# Altium PCB ecs8a_pcb_debug.PcbDoc
Units mil, origin at the board's own origin, x right, y up, seen from the top; angles counter-clockwise.
Board outline 2340 x 2510 mil, 2 copper layers (Top Layer, Bottom Layer); 67 components, 46 nets, 196 pads, 85 vias.
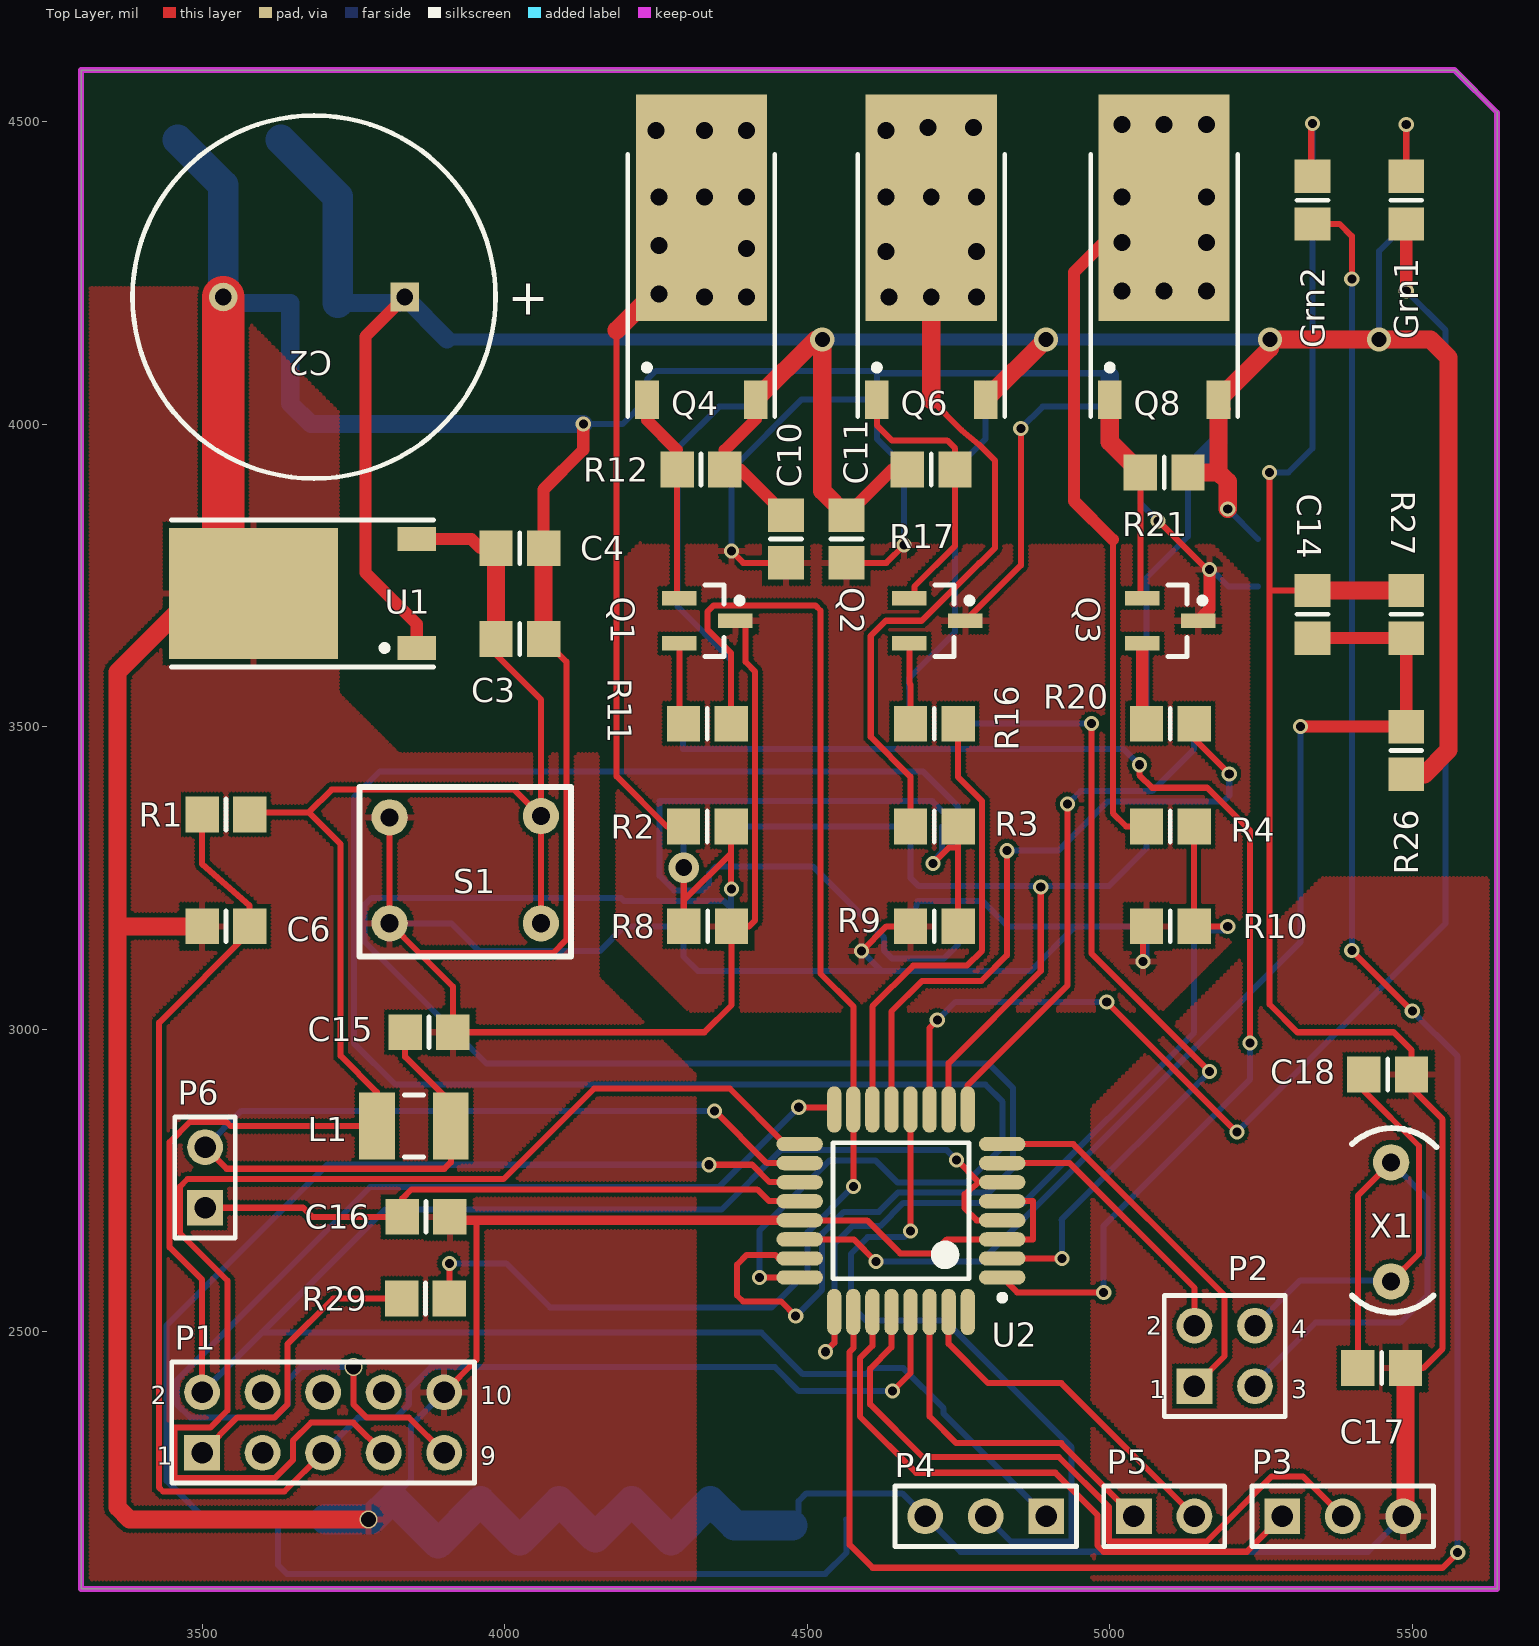
[diagram p0: Top Layer view]
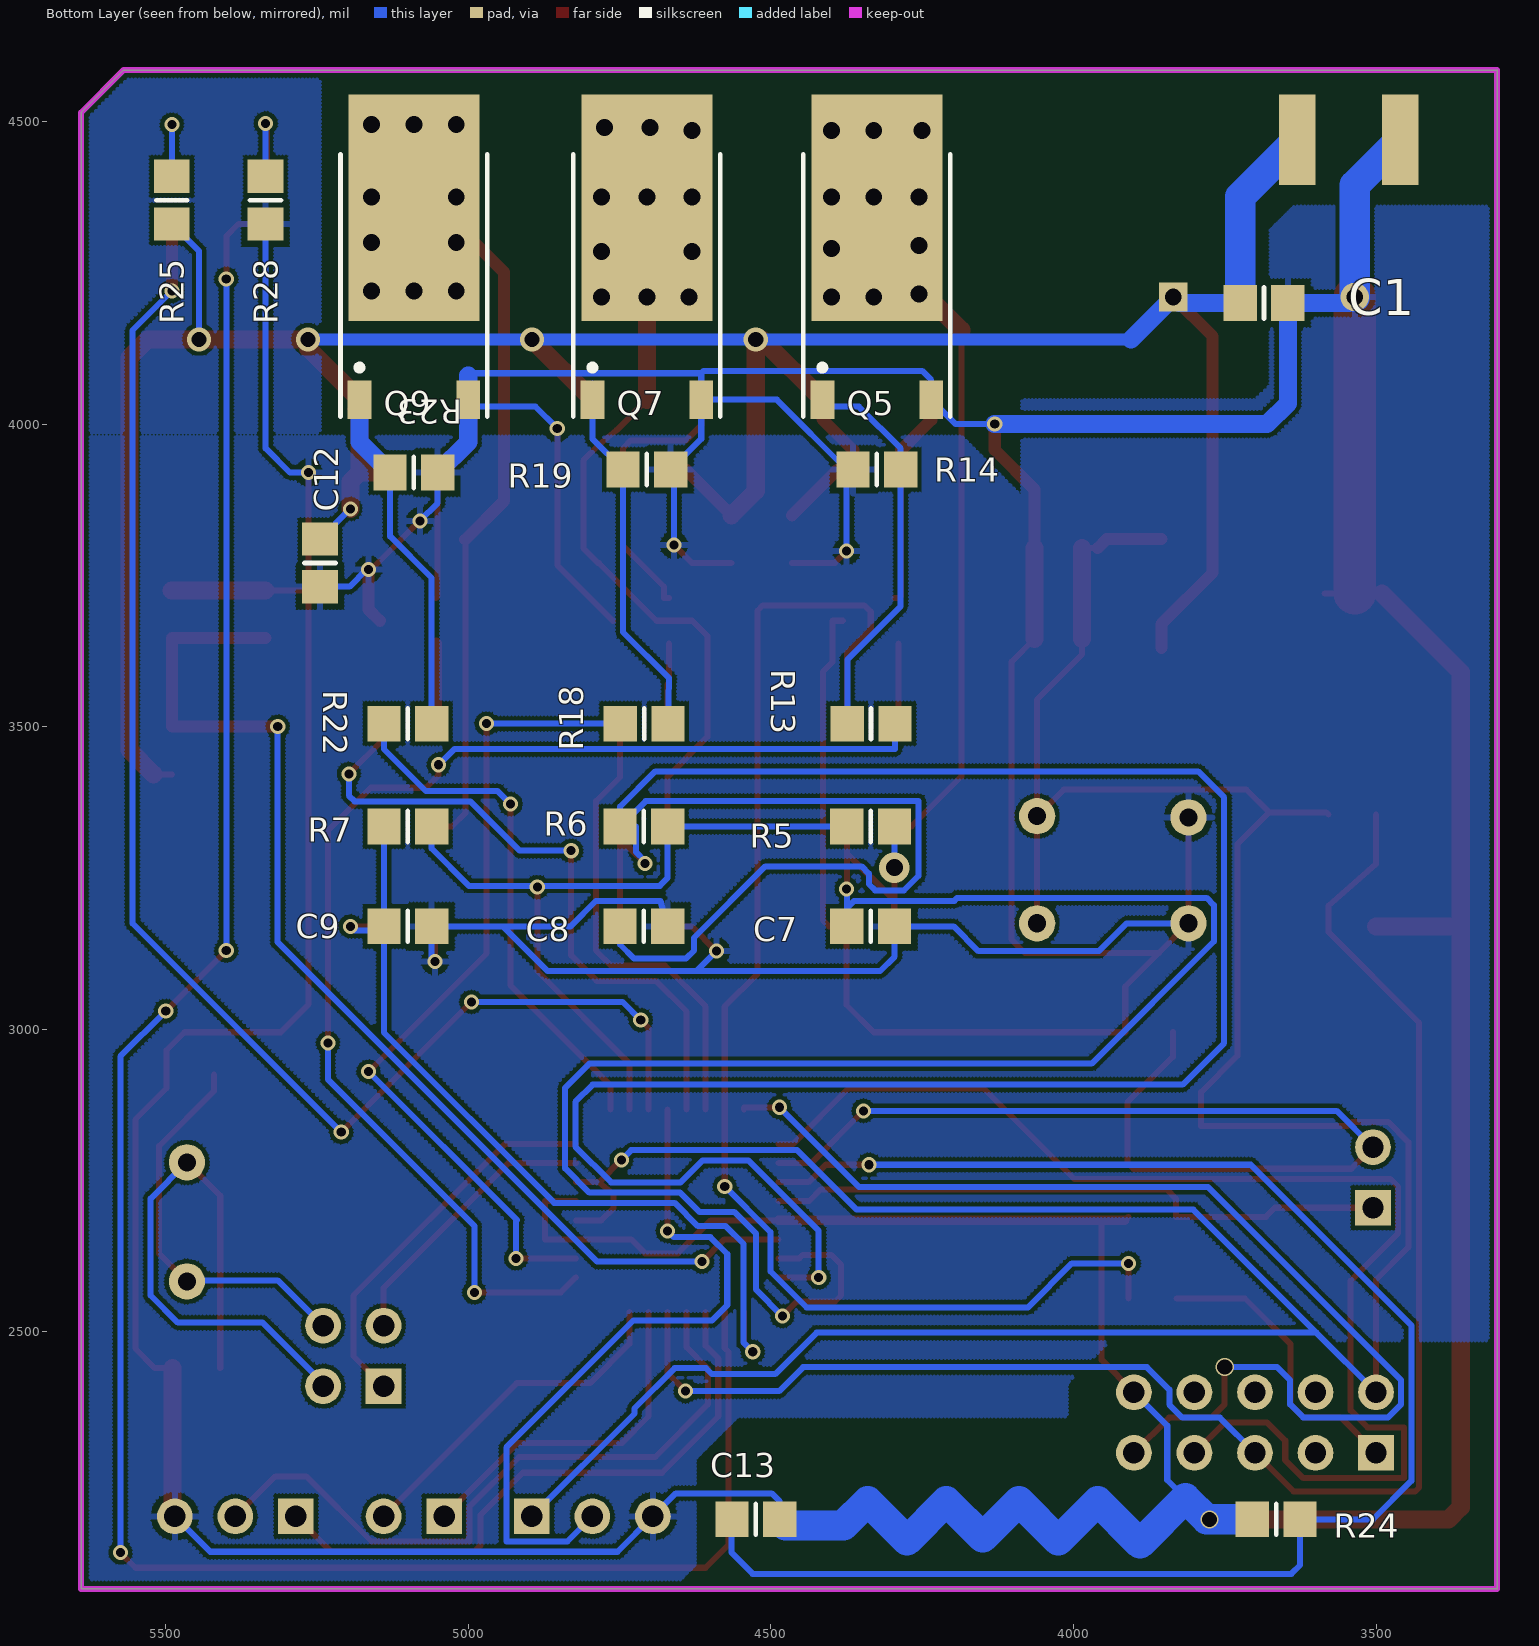
[diagram p1: Bottom Layer view, seen from below]

## Layer stack, top to bottom
Top Solder: solder mask 0.4, Solder Resist, Dk 3.5
Top Layer: signal copper 1.4
Dielectric 1: dielectric 12.6, FR-4, Dk 4.8
Bottom Layer: signal copper 1.4
Bottom Solder: solder mask 0.4, Solder Resist, Dk 3.5

## Board outline
3300,2075 3300,4585 5570,4585 5640,4515 5640,2075

## Design rules (kind name [scope] priority, off if disabled: settings)
Clearance [All] p1: gap=7
HoleSize [All] p1: absolutevalues=TRUE maxlimit=100 minlimit=12 maxpercent=80.000 minpercent=20.000
PolygonConnect [All] p1: connectstyle=Relief reliefconductorwidth=10 reliefentries=4 polygonreliefangle="90 Angle" airgapwidth=10
RoutingVias [All] p1: holewidth=28 width=50 viastyle="Through Hole" minholewidth=28 minwidth=50 maxholewidth=28 maxwidth=50
SolderMaskExpansion [All] p1: expansion=4
Width [All] p1: maxlimit=70 minlimit=10 preferedwidth=10
29 further rules are at their usual default settings.

## Components (designator, comment, footprint, x,y, rotation, side; value= is the part's Value field where it differs from the comment)
C1 "Cap" 6-0805_M 3685,4200 r0 bottom
C2 "Cap Pol1" RB7.6-15 3685,4210 r0 top
C3 "Cap" 6-0805_M 4025,3645 r180 top
C4 "Cap" 6-0805_M 4025,3795 r180 top
C6 "Cap" 6-0805_M 3539.37,3170 r0 top
C7 "Cap" 6-0805_M 4335,3170 r180 bottom
C8 "Cap" 6-0805_M 4710,3170 r180 bottom
C9 "Cap" 6-0805_M 5100,3170 r180 bottom
C10 "Cap" 6-0805_M 4465,3810 r90 top
C11 "Cap" 6-0805_M 4565,3810 r90 top
C12 "Cap" 6-0805_M 5245,3770.63 r90 bottom
C13 "Cap" 6-0805_M 4525,2190 r0 bottom
C14 "Cap" 6-0805_M 5335,3685.63 r90 top
C15 "Cap" 6-0805_M 3875,2995 r0 top
C16 "Cap" 6-0805_M 3870,2690 r0 top
C17 "Cap" 6-0805_M 5449.37,2440 r0 top
C18 "Cap" 6-0805_M 5459.37,2925 r0 top
Grn1 "LED0" 6-0805_M 5490,4370 r270 top
Grn2 "LED0" 6-0805_M 5335,4370 r90 top
L1 "Inductor" C1210_M 3850,2840 r0 top
P1 "Header 5X2" HDR2X5 3500,2300 r0 top
P2 "Header 2X2" HDR2X2 5140,2410 r0 top
P3 "Header 3" HDR1X3 5285,2195 r0 top
P4 "Header 3" HDR1X3 4895,2195 r180 top
P5 "Header 2" HDR1X2 5040,2195 r0 top
P6 "Header 2" HDR1X2 3505,2705 r90 top
Q1 "2N3904" SOT23_M 4335,3675 r0 top
Q2 "2N3904" SOT23_M 4715,3675 r0 top
Q3 "2N3904" SOT23_M 5100,3675 r0 top
Q4 "IRFR5305" TO-252AA 4325,4175.16 r0 top
Q5 "IRFR1205" TO-252AA 4325,4175.16 r180 bottom
Q6 "IRFR5305" TO-252AA 4705,4175.16 r0 top
Q7 "IRFR1205" TO-252AA 4705,4175.16 r180 bottom
Q8 "IRFR5305" TO-252AA 5090,4175.16 r0 top
Q9 "IRFR1205" TO-252AA 5090,4175.16 r180 bottom
R1 "Res3" 6-0805_M 3539.37,3355 r0 top
R2 "Res3" 6-0805_M 4335,3335 r0 top
R3 "Res3" 6-0805_M 4710,3335 r0 top
R4 "Res3" 6-0805_M 5100,3335 r0 top
R5 "Res3" 6-0805_M 4335,3335 r0 bottom
R6 "Res3" 6-0805_M 4710,3335 r180 bottom
R7 "Res3" 6-0805_M 5100,3335 r180 bottom
R8 "Res3" 6-0805_M 4335.63,3170 r180 top
R9 "Res3" 6-0805_M 4710,3170 r0 top
R10 "Res3" 6-0805_M 5100,3170 r0 top
R11 "Res1" 6-0805_M 4335,3505 r0 top
R12 "Res3" 6-0805_M 4324.37,3925 r180 top
R13 "Res1" 6-0805_M 4334.37,3505 r180 bottom
R14 "Res3" 6-0805_M 4325,3925 r180 bottom
R16 "Res1" 6-0805_M 4710,3505 r0 top
R17 "Res3" 6-0805_M 4705,3925 r0 top
R18 "Res1" 6-0805_M 4709.37,3505 r0 bottom
R19 "Res3" 6-0805_M 4705,3925 r0 bottom
R20 "Res1" 6-0805_M 5100,3505 r0 top
R21 "Res3" 6-0805_M 5090,3920 r180 top
R22 "Res1" 6-0805_M 5100,3505 r0 bottom
R23 "Res3" 6-0805_M 5090,3920 r0 bottom
R24 "Res3" 6-0805_M 3665,2190 r180 bottom
R25 "Res3" 6-0805_M 5490,4370 r270 bottom
R26 "Res3" 6-0805_M 5490,3460.63 r270 top
R27 "Res3" 6-0805_M 5490,3685.63 r270 top
R28 "Res3" 6-0805_M 5335,4370 r90 bottom
R29 "Res3" 6-0805_M 3869.37,2555 r180 top
S1 "SW-DPST" switch_4 4060,3175 r180 top
U1 "78M05" TO-252AA 3719.84,3720 r90 top
U2 "ATmega8A-AU" 32A_M 4655,2700 r180 top
X1 "X1 16M" OSC 5465,2780 r270 top

## Footprints (in the part's own frame and the unit in brackets; to place one, negate y for a bottom-side part, rotate by r counter-clockwise, add the part's x,y. Pads: shape width x height; smd on the part's side, far side on the other; paste and mask are expansions set on the pad)
6-0805_M [mm] "Chip Resistor, Body 2.0x1.2mm, IPC Low Density"
  rect 1.4x1.5 smd: 1(-1,0) 2(1,0)
  silkscreen extent 0,-0.65 0,0.65, body extent -1.07,-0.7 1.07,0.7, height 0.7
32A_M [mm] "Thin QFP, 32-Leads, Body 7x7mm, Pitch 0.8mm, IPC Low Density"
  oval 1.95x0.6 smd: 1(-4.25,2.8) 2(-4.25,2) 3(-4.25,1.2) 4(-4.25,0.4) 5(-4.25,-0.4) 6(-4.25,-1.2) 7(-4.25,-2) 8(-4.25,-2.8) 17(4.25,-2.8) 18(4.25,-2) 19(4.25,-1.2) 20(4.25,-0.4) 21(4.25,0.4) 22(4.25,1.2) 23(4.25,2) 24(4.25,2.8)
  oval 0.6x1.95 smd: 9(-2.8,-4.25) 10(-2,-4.25) 11(-1.2,-4.25) 12(-0.4,-4.25) 13(0.4,-4.25) 14(1.2,-4.25) 15(2,-4.25) 16(2.8,-4.25) 25(2.8,4.25) 26(2,4.25) 27(1.2,4.25) 28(0.4,4.25) 29(-0.4,4.25) 30(-1.2,4.25) 31(-2,4.25) 32(-2.8,4.25)
  silkscreen extent -4.38,-2.85 2.85,3.77, body extent -3.5,-3.5 3.5,3.5, height 1.2
C1210_M [mm] "Chip Capacitor, Body 3.2x2.5mm, IPC Low Density"
  rect 1.5x2.8 smd: 1(-1.55,0) 2(1.55,0)
  silkscreen extent -0.4,-1.3 0.4,1.3, body extent -1.7,-1.35 1.7,1.35, height 1.5
HDR1X2 [mm] "Connector; Header; 2 Position"
  rect 1.5x1.5 hole 0.9: 1(0,0)
  round 1.5 hole 0.9: 2(2.54,0)
  silkscreen extent -1.27,-1.27 3.81,1.27
HDR1X3 [mm] "Connector; Header; 3 Position"
  rect 1.5x1.5 hole 0.9: 1(0,0)
  round 1.5 hole 0.9: 2(2.54,0) 3(5.08,0)
  silkscreen extent -1.27,-1.27 6.35,1.27
HDR2X2 [mm] "Connector; Header; 2x2 Position"
  rect 1.5x1.5 hole 0.9: 1(0,0)
  round 1.5 hole 0.9: 2(0,2.54) 3(2.54,0) 4(2.54,2.54)
  silkscreen extent -1.27,-1.27 3.81,3.81
HDR2X5 [mm] "Connector; Header; 5x2 Position"
  rect 1.5x1.5 hole 0.9: 1(0,0)
  round 1.5 hole 0.9: 2(0,2.54) 3(2.54,0) 4(2.54,2.54) 5(5.08,0) 6(5.08,2.54) 7(7.62,0) 8(7.62,2.54) 9(10.16,0) 10(10.16,2.54)
  silkscreen extent -1.27,-1.27 11.43,3.81
OSC [mil]
  round 60 hole 30: 1(0,0) 2(196.85,0)
  silkscreen extent -57,-65 248,75
RB7.6-15 [mm] "Polarized Capacitor (Radial); 2 Leads"
  rect 1.2x1.2 hole 0.7: 1(3.81,0)
  round 1.2 hole 0.7: 2(-3.81,0)
  silkscreen extent -7.62,-7.62 7.62,7.62
SOT23_M [mm] "SOT23, 3-Leads, Body 2.9x1.3mm, Pitch 0.95mm, Lead Span 2.3mm - Reverse Pinning, IPC Low Density"
  rect 1.45x0.6 smd: 1(1.175,0) 2(-1.175,-0.95) 3(-1.175,0.95)
  silkscreen extent -0.1,-1.5 1.48,1.5, body extent -0.7,-1.5 0.7,1.5, height 1.1
switch_4 [mil]
  round 60 hole 30: 1(0,0) 2(250,0) 3(0,-177.17) 4(250,-175)
  silkscreen extent -50,-225 300,55
TO-252AA [mm] "D-PAK/TO-252-AA; 3 Leads (1 Cropped); Body 10.4 (inc. leads) x 6.7 mm (LxW max)"
  rect 1x1.6 smd: 1(-2.285,-3.425) 3(2.285,-3.425)
  rect 5.5x7.1 smd: 4(0,3.425)
  silkscreen extent -3.08,-4.12 3.08,6.87

## Part data
C1 C3 C4 C6 C7 C8 C9 C10 C11 C12 C13 C14 C15 C16 C17 C18: "Capacitor"
C2: "Polarized Capacitor (Radial)"
Grn1 Grn2: "Typical INFRARED GaAs LED"
P1: "Header, 5-Pin, Dual row"
P2: "Header, 2-Pin, Dual row"
P3 P4: "Header, 3-Pin"
P5 P6: "Header, 2-Pin"
Q1 Q2 Q3: "NPN General Purpose Amplifier"
Q4 Q5 Q6 Q7 Q8 Q9: "HEXFET Power MOSFET"
R1 R2 R3 R4 R5 R6 R7 R8 R9 R10 R11 R12 R13 R14 R16 R17 R18 R19 R20 R21 R22 R23 R24 R25 R26 R27 R28 R29: "Resistor"
S1: "Double-Pole, Single-Throw Switch"
U1 X1: library part Component_1
U2: "8-bit AVR Microcontroller, 2.7-5.5V, 16MHz, 8KB Flash, 512 Bytes EEPROM, 1KB SRAM, 32-pin TQFP, Industrial Grade (-40°C to 85°C)"

## Free pads (board coordinates)
  rect 216.53x100 smd: 2(4325,4495) 3(5090,4495) 4(4705,4495)
  rect 60x150 smd far side: 5(3460,4470) 6(3630,4470)
  rect 216.53x100 smd far side: 7(4325,4495) 8(4705,4495) 9(5090,4495)

## Via types
v1: diameter 25, hole 15, Top Layer to Bottom Layer, 46 vias
v2: diameter 50, hole 28, Top Layer to Bottom Layer, 33 vias
v3: diameter 40, hole 25, Top Layer to Bottom Layer, 4 vias
v4: diameter 30, hole 25, Top Layer to Bottom Layer, 2 vias

## Nets (pads, with @x,y where several pads share a name; then routed paths per layer and width w, separated by ;. In a path a pad name is that pad's centre, name@x,y a point inside that pad or via, vN(x,y) a via of type N, cw(c..) or ccw(c..) an arc to the next point about the centre after c; other vN are vias at no path point)
+5V: C3.2 C4.2 L1.1 P1.2 P4.1 R1.2 S1.1 S1.3 U1.3 U2.4 U2.6 | length 5734.8
  Top Layer w10: P1.2 3500,2586 3446.47,2639.53 3446.47,2813.47 3480,2847 3540,2847 3547,2840 L1.1 3788.98,2896.02 3729,2956 3729,3306 3676.5,3358.5 ; R1.2 3582.24,3358.5 3676.5,3358.5 ; C4.2@3960,3795 C4.2 ; C3.2 3985.63,3619.37 4060,3545 S1.3 ; S1.1 S1.3 ; v1(4747,2784) 4783.76,2747.24 ; U2.4 4780,2684.25 4760,2704.25 4760,2727.24 4783.76,2747.24 ; U2.6 4783.76,2747.24 ; 3676.5,3358.5 3714,3396 4016.17,3396 S1.3
  Top Layer w20: U1.3 3945.04,3809.96 C4.2@3960,3795
  Top Layer w30: C3.2 C4.2
  Bottom Layer w10: P1.2 3598.53,2498.53 ; v1(4747,2784) 4730.74,2800.26 4456.65,2800.26 4358.39,2702 3802,2702 3598.53,2498.53 ; P4.1 4725.41,2364.59 4725.41,2373.49 4658.9,2440 4607.26,2440 4597.26,2430 4493,2430 4424.47,2498.53 3598.53,2498.53
AH: R11.2 R29.1 U2.15 | length 2246.2
  Top Layer w10: R29.1 v1(3908.74,2613) ; R11.2 4374.37,3621.63 4335,3661 4335,3690 4345,3700 4514,3700 4522,3692 4522,3092 4576.26,3037.74 U2.15 v1(4576.26,2740.32)
  Bottom Layer w10: v1(3908.74,2613) 4002.45,2613 4075,2540.45 4441.1,2540.45 4500.65,2600 4500.65,2664.7 v1(4576.26,2740.32)
AL: R13.2 U2.1 | length 2086.1
  Top Layer w10: U2.1 4847.09,2565 v1(4990,2565) ; v1(5049,3437) 5049,3420 5070,3399 5161,3399 5232,3328 v1(5232,2977)
  Bottom Layer w10: R13.2 4295,3463 5023,3463 v1(5049,3437) ; v1(4990,2565) 4990,2675 5232,2917 v1(5232,2977)
AVERAGE: R5.2 R6.2 R7.2 U2.10 | length 1271.3
  Top Layer w10: U2.10 4733.74,2943.97 4886,3096.23 v1(4886,3235)
  Bottom Layer w10: R5.2 R6.2 4670.63,3250 4683.63,3237 v1@4886,3237 ; v1(4886,3235) v1@4886,3237 ; R7.2 5060.63,3298.63 4999,3237 v1@4886,3237
BH: R16.2 U2.14 | length 781.3
  Top Layer w10: U2.14 4607.76,3037.76 4675,3105 4764,3105 4789,3130 4789,3377 4749.37,3416.63 R16.2
BL: R18.2 U2.2 | length 1386.7
  Top Layer w10: U2.2 v1(4921.26,2621.26) ; v1(4970,3505) 4970,3125 v1(5165,2930)
  Bottom Layer w10: R18.2 v1(4970,3505) ; v1(4921.26,2621.26) 4921.26,2683.74 4920,2685 v1(5165,2930)
CH: R20.2 U2.13 | length 1112.3
  Top Layer w10: U2.13 4639.25,3029.25 4690,3080 4788,3080 4830,3122 v1(4830,3295) ; R20.2 5139.37,3480.1 v1(5197.47,3422)
  Bottom Layer w10: v1(4830,3295) 4915,3295 4996.53,3376.53 5188,3376.53 5197.47,3386 v1(5197.47,3422)
CL: R22.2 U2.9 | length 861.9
  Top Layer w10: U2.9 4765.24,2907.24 4930,3072 v1(4930,3371.92)
  Bottom Layer w10: v1(4930,3371.92) 4951.61,3393.53 5069.9,3393.53 5139.37,3463 R22.2
CURRENT: C13.2 R24.2 U2.19 | length 2726.2
  Top Layer w10: v1(4338,2776) 4409,2776 4437.76,2747.24 U2.19
  Bottom Layer w10: v1(4338,2776) 3707,2776 3441.47,2510.47 3441.47,2253.53 3505,2190 R24.2 3625.63,2114.37 3640,2100 4530,2100 4565,2135 4565,2189.37 C13.2
GND: C1.1 C2.2 C3.1 C4.1 C6.1 C7.2 C8.2 C9.2 C10.1 C11.1 C12.1 C13.1 C14.2 C15.2 C16.2 C17.2 C18.2 P1.10 P3.3 P4.3 pad.5 Q1.1 Q2.1 Q3.1 Q5.3 Q7.3 Q9.3 R8.1 R9.1 R10.1 R14.1 R19.1 R23.1 R24.1 R27.1 R28.1 S1.2 S1.4 U1.4 U2.3 U2.5 U2.21 | length 17878.4
  Top Layer w10: 3360,3175 3365,3170 ; U1.4@3490,3720 3535,3720 U1.4 ; v4(3775,2190) v4@3785,2190 ; S1.4 S1.2 3859,3126 ; P1.10 3953.53,2453.53 3953.53,2680 3949.28,2684.25 ; C16.2 C16.2@3915.12,2684.25 ; C3.1 4102,3607.37 4102,3148 4080,3126 3859,3126 ; v1(4375,3790) 4394.37,3770.63 C10.1 ; Q1.1 4398,3675 4398,3607 4414,3591 4414,3180 4404,3170 R8.1 4375,3040 4330,2995 C15.2 3914.37,3070.63 3859,3126 ; U2.21 4599.08,2684.25 4653.75,2629.59 4707.75,2629.59 4730.92,2652.76 U2.3 4873,2652.76 4873,2715.75 U2.5 ; C11.1 4630.63,3770.63 v1(4660,3800) ; v1(4590,3129) 4631,3170 R9.1 ; Q2.1 4853,3766.74 v1(4853,3993) ; v1(5055,3112) 5055,3170 R10.1 ; v1(5080,3840) 5160,3760 v1(5165,3760) ; v1(5264,3920) 5264,3725 ; C14.2 5264,3725 ; P3.3 P3.3@5488.74,2198.74 ; C17.2 5518,2440 5550,2472 5550,2851 5498.74,2902.26 C18.2 5498.74,2965.26 5469,2995 5310,2995 5264,3041 5264,3725
  Top Layer w15: C16.2@3915.12,2684.25 3949.28,2684.25 U2.21
  Top Layer w20: C4.1 4064.37,3892 4130,3957.63 v1(4130,4000) ; Q3.1 5165,3693.74 v1(5165,3760)
  Top Layer w30: 3365,3170 C6.1 ; U1.4@3490,3720 3360,3590 3360,3175 3360,2210 3380,2190 v4(3775,2190) ; C3.1 C4.1 ; C14.2 R27.1 ; P3.3@5488.74,2198.74 C17.2
  Top Layer w70: U1.4@3535,3720 C2.2
  Bottom Layer w10: C2.2 C2.2@3545,4200 ; S1.2 3912,3175 3958,3129 4157,3129 4198,3170 C7.2 4295.63,3120 4319.63,3096 4623,3096 ; 3815,2225 3845,2255 3845,2345 P1.10 ; v1(4130,4000) 4194.73,4000 Q5.3 4235.04,4073.08 4250,4088.04 4611,4088.04 4615.04,4084 ; v1(4375,3790) 4375,3914.37 R14.1 4375,3925 4490.31,4040.31 Q7.3 ; C13.1@4475.63,2180 C13.1 4485.63,2220 4498.63,2233 4657,2233 P4.3 4753.53,2136.47 5426.47,2136.47 P3.3 ; v1(4590,3129) 4623,3096 ; v1(4660,3800) 4660,3919.37 R19.1 4615.04,3975.59 Q7.3 ; C8.2 4682.63,3212 4789,3212 4831,3170 4943,3170 ; v1(4853,3993) 4889,4029 5000.04,4029 Q9.3 ; 5000.04,4080 4996.04,4084 4615.04,4084 ; R23.1 5050.63,3869.37 v1(5080,3840) ; v1(5055,3112) 5060.63,3117.63 C9.2 4943,3170 ; v1(5165,3760) 5167.52,3760 5196.26,3731.26 C12.1 ; v1(5264,3920) 5295,3920 5335,3960 R28.1 ; Q7.3 4615.04,4084 ; 4623,3096 4869,3096 4943,3170
  Bottom Layer w30: C2.2@3545,4200 C1.1 3645.63,4034.37 3680,4000 v1(4130,4000) ; Q9.3@5000.04,4029 5000.04,3970.59 R23.1 ; Q9.3 5000.04,4080
  Bottom Layer w50: pad.5 3535,4395 C2.2 ; R24.1 v4(3775,2190) 3780,2190 3815,2225 3890,2150 3960,2220 4025,2155 4090,2220 4150,2160 4210,2220 4275,2155 4340,2220 4380,2180 C13.1@4475.63,2180
GREEN: Grn1.2 U2.11 | length 2419.9
  Top Layer w10: U2.11 4702.24,3002.24 v1(4715,3015) ; v1(4995,3045) v1(5210,2830)
  Top Layer w20: v1(5490,4220) Grn1.2
  Bottom Layer w10: v1(4715,3015) 4745,3045 v1(4995,3045) ; v1(5210,2830) 5555,3175 5555,4155 v1(5490,4220)
MISO: P1.9 U2.16 | length 1920.4
  Top Layer w10: v4(3750,2442) 3750,2380 3772,2358 3842,2358 P1.9 ; v1(4486,2871) 4544.76,2871 U2.16
  Bottom Layer w10: v4(3750,2442) 3664,2442 3642,2420 3642,2380 3620.47,2358.47 3480,2358.47 3458.47,2380 3458.47,2420 3777.47,2739 4354,2739 v1(4486,2871)
NetC15_1: C15.1 L1.2 P6.2 U2.18 | length 1714.6
  Top Layer w10: P6.2 3540.56,2769.44 3900.46,2769.44 3911.02,2780 L1.2 3911.02,2879 3835.63,2954.39 C15.1 ; v1(4347,2865) 4433.26,2778.74 U2.18
  Bottom Layer w10: P6.2 3565,2865 v1(4347,2865)
NetC16_1: C16.1 P6.1 U2.20 | length 1033.4
  Top Layer w10: P6.1 3667,2705 3682,2690 C16.1 3830.63,2720 3846.07,2735.44 4417.31,2735.44 4437,2715.75 U2.20
NetC17_1: C17.1 P2.3 X1.1 | length 957.7
  Top Layer w10: C17.1 5410,2725 X1.1
  Bottom Layer w10: P2.3 5240,2415 5340,2515 5480,2515 5525,2560 5525,2720 X1.1
NetC18_1: C18.1 P2.4 X1.2 | length 655.4
  Top Layer w10: C18.1 5420,2898 5511,2807 5511,2629.15 X1.2
  Bottom Layer w10: P2.4 5315,2585 5463.15,2585 X1.2
NetGrn1_1: Grn1.1 R25.1 | length 171.3
  Top Layer w10: Grn1.1 v1(5490,4495)
  Bottom Layer w10: R25.1 v1(5490,4495)
NetGrn2_2: Grn2.2 R28.2 | length 178.1
  Top Layer w10: Grn2.2 5333,4409.37 5333,4495 v1(5335,4497)
  Bottom Layer w10: R28.2 v1(5335,4497)
NetP1_1: P1.1 R29.2 | length 494.2
  Top Layer w10: P1.1 3558.47,2358.47 3620,2358.47 3641.53,2380 3641.53,2480 3716.53,2555 R29.2
NetP2_1: P2.1 U2.8 | length 642
  Top Layer w10: U2.8 4939.76,2810.24 5190,2560 5190,2460 P2.1
NetP2_2: P2.2 U2.7 | length 465.6
  Top Layer w10: U2.7 4933.74,2778.74 5140,2572.48 P2.2
NetQ1_2: Q1.2 R11.1 | length 135.5
  Top Layer w10: Q1.2 4288.74,3511.89 R11.1
NetQ1_3: Q1.3 Q4.1 R12.2 | length 357.2
  Top Layer w10: 4235.04,4006.96 Q4.1 ; 4285,3957 R12.2 4285,3716.14 Q1.3 Q1.3@4295.76,3712.4
  Top Layer w20: 4235.04,4006.96 4285,3957
NetQ2_2: Q2.2 R16.1 | length 133.4
  Top Layer w10: Q2.2 4668.74,3571.89 4670.63,3570 R16.1
NetQ2_3: Q2.3 Q6.1 R17.2 | length 471.2
  Top Layer w10: Q6.1 4615.04,3997.96 4640,3973 4731.37,3973 4744.37,3960 R17.2 4744.37,3799 4677,3731.63 4677,3712.4 Q2.3
NetQ3_2: Q3.2 R20.1 | length 135.5
  Top Layer w10: R20.1@5053.74,3511.89 R20.1
  Top Layer w20: R20.1@5053.74,3511.89 Q3.2
NetQ3_3: Q3.3 Q8.1 R21.2 | length 350.2
  Top Layer w10: R21.2 5050.63,3715.51 Q3.3
  Top Layer w30: Q8.1 5000.04,3970.59 R21.2
NetQ5_1: Q5.1 R13.1 R14.2 | length 660.7
  Bottom Layer w10: R13.1 4373.74,3610.89 4285.63,3699 R14.2 4285.63,3960 4354.63,4029 4414.96,4029 Q5.1
NetQ7_1: Q7.1 R18.1 R19.2 | length 614.6
  Bottom Layer w10: R18.1 4668.24,3580 4744.37,3656.13 R19.2 4794.96,3975.59 Q7.1 Q7.1@4794.96,4067
NetQ9_1: Q9.1 R22.1 R23.2 | length 584.7
  Bottom Layer w10: R22.1 5060.63,3745.63 5129.37,3814.37 R23.2
  Bottom Layer w30: R23.2 5179.96,3970.59 Q9.1
NULLA: C7.1 R2.2 R5.1 R8.2 U2.23 | length 3257.1
  Top Layer w10: v2(4296,3267) 4296,3170 R8.2 4296.26,3213 4374.37,3291.11 ; R2.2 4374.37,3291.11 ; v1(4375,3232) 4374.37,3232.63 4374.37,3291.11 ; v1(4481,2526) 4457,2550 4394,2550 4384,2560 4384,2611 4400,2627 4447.26,2627 4453,2621.26 U2.23
  Bottom Layer w10: R5.1 4295.63,3286.37 4296,3286 v2(4296,3267) ; C7.1 4374.37,3200 ; v1(4375,3232) 4374.37,3231.37 4374.37,3200 ; v1(4481,2526) 4524.54,2569.54 4524.54,2662.19 4560.65,2698.3 4618.3,2698.3 4650,2730 4800,2730 4840,2770 4840,2903 4800,2943 3970,2943 3768,3145 3768,3205 3780,3217 4192,3217 4197,3212 4362.37,3212 4374.37,3200
NULLB: C8.1 R3.2 R6.1 R9.2 U2.24 | length 4887.7
  Top Layer w10: v1(4421,2589.76) U2.24 ; v1(4708,3274) 4734,3300 4749.37,3300 ; R9.2 4749.37,3300 ; R3.2 4749.37,3300
  Bottom Layer w10: v1(4421,2589.76) 4421,2667 4537.26,2783.26 4612.74,2783.26 4649,2747 4764,2747 4823,2806 4823,2880 4794.7,2908.3 3819.7,2908.3 3751,2977 3751,3383 3794,3426 4691,3426 4749.37,3367.63 R6.1 R6.1@4749,3335 ; v1(4708,3274) 4708,3278 4723,3293 4723,3335 R6.1@4749,3335 ; C8.1 4749.37,3140 4726.37,3117 4640,3117 4627,3130 4627,3151 4509,3269 4350,3269 4338,3257 4338,3240 4327.55,3229.55 4280,3229.55 4256,3253.55 4256,3377 4707,3377 R6.1@4749,3335
NULLC: C9.1 R4.2 R7.1 R10.2 U2.25 | length 1615.6
  Top Layer w10: v1(4530,2467) 4544.76,2481.76 U2.25 ; R4.2 5139,3335 5139,3170 R10.2 v1(5195,3170)
  Bottom Layer w10: v1(4530,2467) 4545,2482 4545,2645 4574.65,2674.65 4620.65,2674.65 4659,2713 4858,2713 5139.37,2994.37 C9.1@5139.37,3163 ; R7.1 C9.1 C9.1@5139.37,3163 ; v1(5195,3170) 5188,3163 C9.1@5139.37,3163
PHASEA: pad.2 pad.7 Q4.4 Q5.4 R2.1 | length 1095
  Top Layer w10: 4185,4155 4185,3418 4268,3335 R2.1 ; Q4.4@4325,4295 Q4.4
  Top Layer w30: 4185,4155 Q4.4@4325,4295
  other v2: 4330,4210 4400,4210 4255,4215 4400,4290 4255,4295 4255,4375 4330,4375 4400,4375 4250,4485 4330,4485 4400,4485
PHASEB: pad.4 pad.8 Q6.4 Q7.4 R3.1 | length 1232.4
  Top Layer w10: R3.1 4670.63,3417.37 4605,3483 4605,3650 4630,3675 4689,3675 4784,3770 4785,3770 4810,3795 4810,3940 4784,3966 4755,3990 4705,4040 ; v2(4705,4210) Q6.4 v2(4705,4375)
  Top Layer w30: 4705,4040 v2(4705,4210)
  other v2: 4635,4210 4780,4210 4630,4285 4780,4285 4630,4375 4780,4375 4630,4485 4700,4490 4775,4490
PHASEC: pad.3 pad.9 Q8.4 Q9.4 R4.1 | length 1264.7
  Top Layer w10: Q8.4@5000,4310 Q8.4 v2(5090,4220) Q8.4@5090,4204 ; 5005,3809 5005,3357 5027,3335 R4.1
  Top Layer w20: Q8.4@5000,4310 4941,4251 4941,3873 5005,3809
  other v2: 5020,4220 5160,4220 5020,4300 5160,4300 5020,4375 5160,4375 5020,4495 5090,4495 5160,4495
PPM: P4.2 U2.12 | length 1176.7
  Top Layer w10: v1(4670.75,2666.59) U2.12
  Bottom Layer w10: v1(4670.75,2666.59) 4660.58,2656.42 4600,2656.42 4572.12,2628.55 4572.12,2543.88 4597,2519 4727,2519 4937,2309 4937,2153.47 4836.53,2153.47 P4.2
RED: Grn2.1 U2.26 | length 3739.8
  Top Layer w10: U2.26 4576.26,2473 4570,2466.74 4570,2148 4608,2110 5550,2110 v1(5575,2135) ; Grn2.1 5380,4330.63 5400,4310.63 v1(5400,4240) ; v1(5400,3130) v1(5500,3030)
  Bottom Layer w10: v1(5400,3130) v1(5400,4240) ; v1(5500,3030) 5575,2955 v1(5575,2135)
RESET: C6.2 P1.5 R1.1 U2.29 | length 2684.2
  Top Layer w10: R1.1 3500,3273 3578.74,3204.26 C6.2 3578.74,3160.74 3429,3011 3429,2242.38 3435.37,2236.01 3636.01,2236.01 P1.5 ; v1(4641,2402) 4670.75,2431.75 U2.29
  Bottom Layer w10: P1.5 3758,2358 3820,2358 3841.53,2379.53 3841.53,2404.53 3878.53,2441.53 4446.76,2441.53 4486.29,2402 v1(4641,2402)
RXD: P5.1 U2.30 | length 579.4
  Top Layer w10: U2.30 4702.24,2360 4746.24,2316 4920,2316 4920,2315 P5.1
SCK: P1.7 U2.17 | length 2139
  Top Layer w10: P1.7 3750,2350 3680,2350 3650,2320 3650,2288 3620,2258 3454,2258 3454,2342 3514,2342 3542,2370 3542,2584.47 3463.47,2663 3463.47,2740 3475.91,2752.44 3998.44,2752.44 4148,2902 4372,2902 4463.76,2810.24 U2.17
SCL: P3.2 U2.28 | length 1147.4
  Top Layer w10: U2.28 4639.25,2474.25 4604,2439 4604,2380 4691,2293 4916,2293 4998.47,2210.53 4998.47,2153.47 5160,2153.47 5267.53,2261 5319,2261 P3.2
SDA: P3.1 U2.27 | length 1025.7
  Top Layer w10: U2.27 4607.76,2476.76 4587,2456 4587,2360 4680,2267 4909.99,2267 4980,2196.99 4980,2146.47 4990,2136.47 5226.47,2136.47 P3.1
TXD: P5.2 U2.31 | length 577
  Top Layer w10: U2.31 4733.74,2480 4798.74,2415 4920,2415 P5.2
UBAT: C14.1 R26.1 R27.2 U2.22 | length 1893.5
  Top Layer w10: U2.22 4577,2652.76 v1(4613.76,2616)
  Top Layer w20: v1(5315,3500) R26.1 R27.2 C14.1
  Bottom Layer w10: v1(4613.76,2616) 4787,2616 5315,3144 v1(5315,3500)
VCC: C1.2 C2.1 C10.2 C11.2 C12.2 pad.6 Q4.3 Q6.3 Q8.3 R12.1 R17.1 R21.1 R25.2 R26.2 U1.1 | length 5241
  Top Layer w10: 4363.74,3957 R12.1 R12.1@4389.37,3925 ; 4414.96,4008.22 Q4.3 ; v3@4514.65,4140 v3(4525,4140) ; R17.1@4640.63,3925 R17.1 ; 5179.92,3920 5179.96,3920.04 ; Q8.3@5180.27,4040 Q8.3@5195,4025.27 ; v3@5265,4125.35 v3(5265,4140) ; R26.2 5520,3421.26
  Top Layer w20: C2.1 3770,4145 3770,3754.37 3854.69,3669.69 U1.1 ; 4363.74,3957 4414.96,4008.22 ; R12.1@4389.37,3925 C10.2 ; C11.2 R17.1@4640.63,3925
  Top Layer w30: Q4.3 v3@4514.65,4140 ; v3(4525,4140) 4525,3889.37 C11.2 ; Q6.3 v3(4894.65,4140) ; R21.1 5179.92,3920 ; v1(5195,3860) 5195,3905 5179.96,3920.04 Q8.3 v3@5265,4125.35 ; v3(5265,4140) v3(5445,4140) 5530,4140 5560,4110 5560,3461.26 5520,3421.26
  Bottom Layer w10: C2.1@3825,4200 C2.1 ; v3(4894.65,4140) v3@4895,4140 ; v1(5195,3860) C12.2 ; v3(5445,4140) 5445,4285.63 R25.2
  Bottom Layer w20: 3905,4140 v3(4525,4140) v3(4894.65,4140) ; v3@4895,4140 v3(5265,4140)
  Bottom Layer w30: C1.2 C2.1@3825,4200 ; C2.1 3905,4140
  Bottom Layer w50: pad.6 3724.37,4375.63 C1.2
pads on no net: P1.3 P1.4 P1.6 P1.8 U2.32

## Polygon pours and split planes (outlines as drawn)
GND on Top Layer "top Layer-gnd-3" (hatched 90Degree grid 0 track 6, pour order 20): 4225,3800 5165,3800 5170,3800 5230,3740 5230,3245 5230,3175 5095,3040 5085,3030 4305,3030 4180,3155 4185,3160 4185,3755 4185,3765 4225,3805
GND on Top Layer "Top Layer-gnd-2" (hatched 90Degree grid 0 track 6, pour order 12): 3300,4225 3520,4225 3535,4210 3725,4020 3725,3560 3725,3555 3825,3455 4155,3455 4155,3085 4275,2965 4315,2925 4315,2075 3300,2075 3300,4225
GND on Top Layer "Top Layer-gnd-1" (hatched 90Degree grid 0 track 6, pour order 10): 5640,3250 5350,3250 4980,2880 4970,2870 4970,2075 5640,2075 5640,3250
GND on Bottom Layer "bottom Layer-gnd-3" (hatched 90Degree grid 0 track 6, pour order 18): 3300,4360 3635,4360 3670,4325 3675,4320 3675,4080 3675,4065 3700,4040 4085,4040 4085,3884 4087,3882 4080,3875 3630,3875 3625,3875 3450,4050 3300,4050 3300,4355
GND on Bottom Layer "bottom Layer-gnd-2" (hatched 90Degree grid 0 track 6, pour order 16): 5250,4585 5570,4585 5640,4515 5640,3985 5249,3985 5244,3980 5245,3981 5245,4585
GND on Bottom Layer "bottom Layer-gnd-1" (hatched 90Degree grid 0 track 6, pour order 14): 3300,4050 3450,4050 3625,3875 4060,3875 4080,3875 4185,3980 4475,3980 5640,3980 5640,2075 4665,2075 4635,2105 4625,2115 4625,2285 4625,2290 4575,2340 4555,2360 4010,2360 4010,2415 3940,2485 3300,2485 3300,4050

## Keep-outs
Keep-Out Layer:
  lines w10: 3300,2075 5640,2075 5640,4515 5570,4585 3345,4585 3300,4585 3300,2075

## Text inside footprints (layer, text, board x,y; h text height)
C2: Top Overlay "+" at 4005.15,4180.99 h59.06
P1: Top Overlay "10" at 3960,2380 h30; Top Overlay "9" at 3960,2280 h30; Top Overlay "1" at 3425,2280 h30; Top Overlay "2" at 3415,2380 h30
P2: Top Overlay "1" at 5065,2390 h30; Top Overlay "2" at 5060,2495 h30; Top Overlay "4" at 5300,2490 h30; Top Overlay "3" at 5300,2390 h30